# Altium PCB esp_altimeter_1.PcbDoc
Units mm, origin at the board's own origin, x right, y up, seen from the top; angles counter-clockwise.
Board outline 18.75 x 26.5 mm, 2 copper layers (Top Layer, Bottom Layer); 24 components, 15 nets, 82 pads, 21 vias.
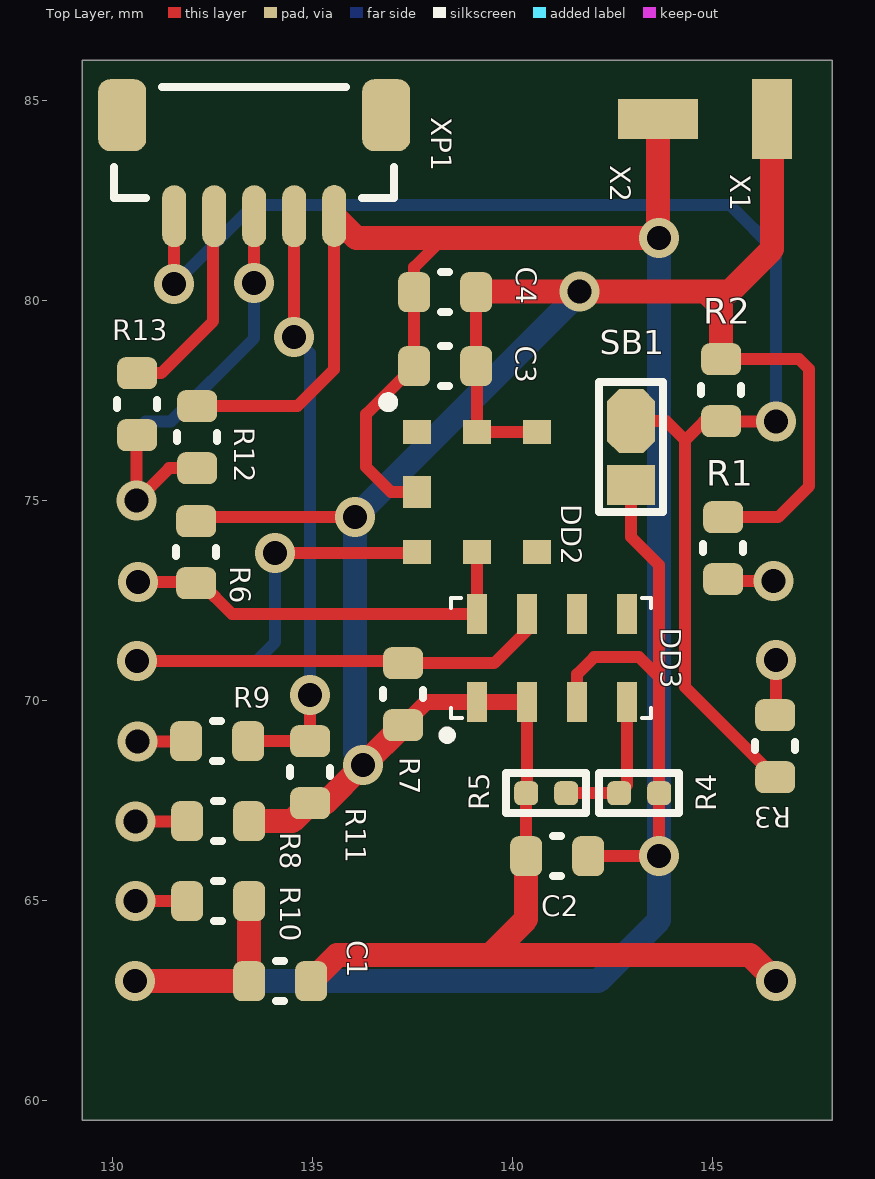
[diagram p0: Top Layer view]
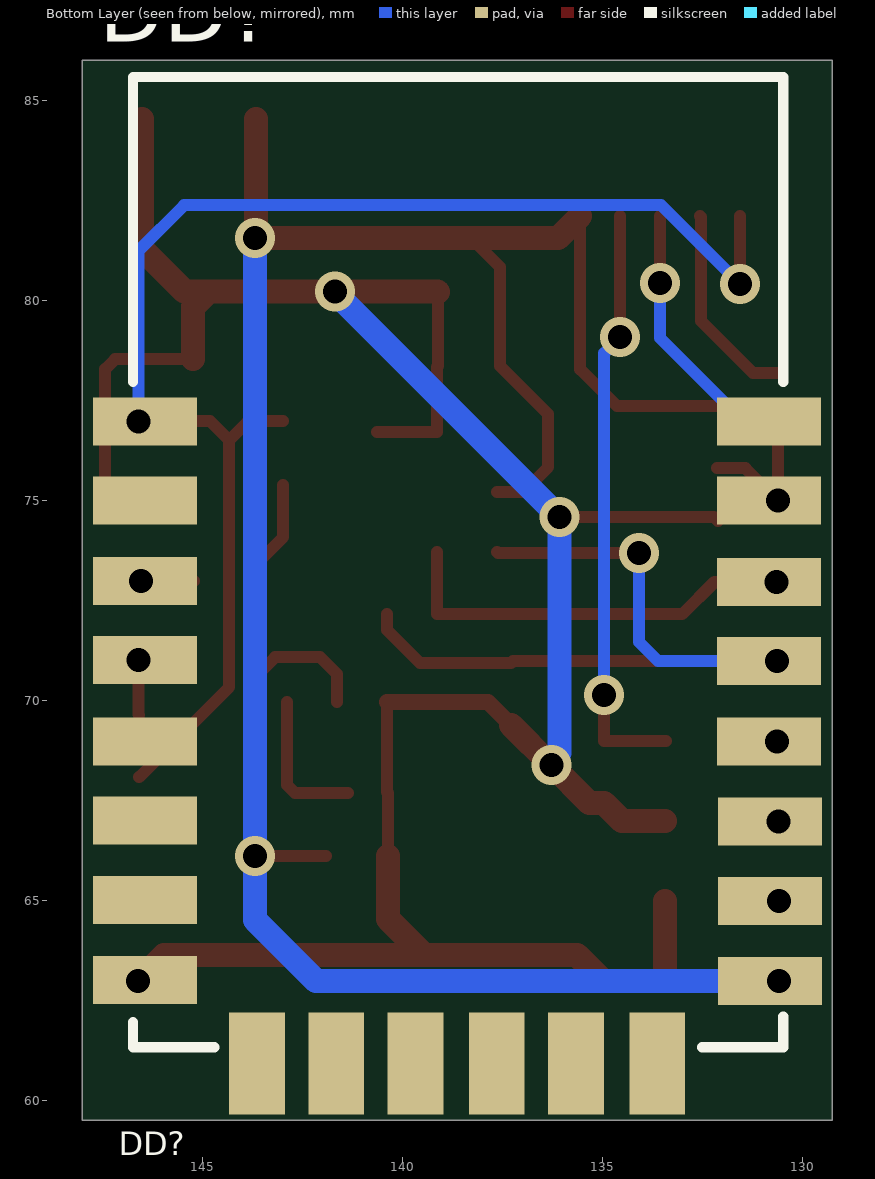
[diagram p1: Bottom Layer view, seen from below]
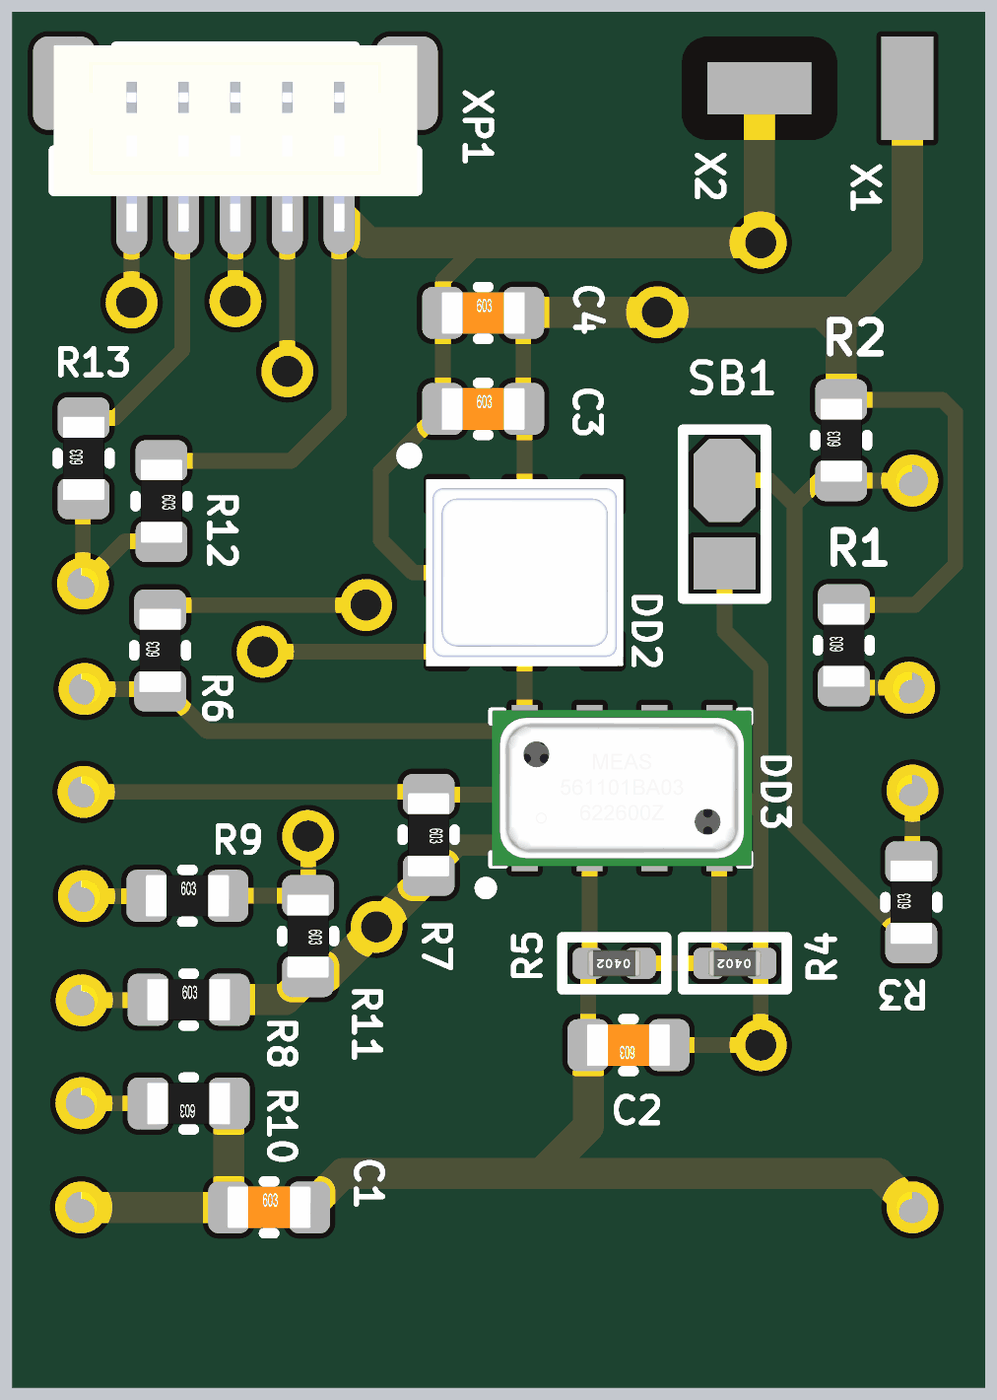
[diagram p2: 3D render of the assembled board from above, using the file's embedded part models]

## Layer stack, top to bottom
Top Solder: solder mask 0.0102, Solder Resist, Dk 3.5
Top Layer: signal copper 0.0356
Dielectric 1: dielectric 0.32, FR-4, Dk 4.8
Bottom Layer: signal copper 0.0356
Bottom Solder: solder mask 0.0102, Solder Resist, Dk 3.5

## Board outline
129.25,59.5 129.25,86 148,86 148,59.5

## Design rules (kind name [scope] priority, off if disabled: settings)
Clearance [All] p1: gap=0 ignorepadtopadclearanceinfootprint=FALSE
PolygonConnect [All] p1: connectstyle=Relief reliefconductorwidth=0.254 reliefentries=4 polygonreliefangle="90 Angle" airgapwidth=0.254
RoutingVias [All] p1: holewidth=0.6 width=1 viastyle="Through Hole" minholewidth=0.6 minwidth=1 maxholewidth=0.6 maxwidth=1
SolderMaskExpansion [All] p1: expansion=0.102
Width [All] p1: maxlimit=2 minlimit=0.3 preferedwidth=0.3
30 further rules are at their usual default settings.

## Components (designator, comment, footprint, x,y, rotation, side; value= is the part's Value field where it differs from the comment)
C1 "Cap EIA 0603" "CAP EIA 0603" 134.2,62.975 r0 top value=0.1uF
C2 "Cap EIA 0603" "CAP EIA 0603" 141.125,66.1 r180 top value=100nF
C3 "Cap EIA 0603" "CAP EIA 0603" 138.325,78.35 r0 top
C4 "Cap EIA 0603" "CAP EIA 0603" 138.325,80.2 r0 top
DD2 "BMP180" BMP180 139.125,75.2 r180 top
DD3 "MS5611" MS5611 140.975,71.05 r90 top
DD? "ESP8266-12E" "ESP8266 ESP-12-E" 129.839,60.562 r180 bottom
R1 "Res EIA 0603" "RES EIA 0603" 145.275,73.8 r90 top value=10k
R2 "Res EIA 0603" "RES EIA 0603" 145.225,77.75 r90 top value=10k
R3 "Res EIA 0603" "RES EIA 0603" 146.575,68.85 r90 top value=470
R4 "Res EIA 0402" "RES EIA 0402" 143.175,67.675 r180 top value=0
R5 "Res EIA 0402" "RES EIA 0402" 140.85,67.675 r180 top value=0
R6 "Res EIA 0603" "RES EIA 0603" 132.1,73.7 r90 top value=10k
R7 "Res EIA 0603" "RES EIA 0603" 137.275,70.15 r270 top value=10k
R8 "Res EIA 0603" "RES EIA 0603" 132.65,66.975 r0 top value=10k
R9 "BURN" "RES EIA 0603" 132.625,68.975 r0 top
R10 "Res EIA 0603" "RES EIA 0603" 132.65,64.975 r180 top value=10k
R11 "Res EIA 0603" "RES EIA 0603" 134.95,68.2 r270 top value=10k
R12 "Res EIA 0603" "RES EIA 0603" 132.125,76.575 r270 top value=22k
R13 "Res EIA 0603" "RES EIA 0603" 130.625,77.4 r90 top value=10k
SB1 "RESET" SB_Connector 142.975,76.275 r90 top value="Соединительная площадка"
X1 "V_Bat+" "Pin - Referal"#1 146.5,84.525 r0 top value="Generic Pin Contact Referal"
X2 "V_Bat_GND" "Pin - Referal"#2 143.65,84.525 r0 top value="Generic Pin Contact Referal"
XP1 "BM05B-SRSS-TB" BM05B-SRSS-TB 133.55,83.825 r0 top value="Разъем штыревой 5-и контактный угловой"

## Footprints (in the part's own frame and the unit in brackets; to place one, negate y for a bottom-side part, rotate by r counter-clockwise, add the part's x,y. Pads: shape width x height; smd on the part's side, far side on the other; paste and mask are expansions set on the pad)
BM05B-SRSS-TB [mm]
  rrect50% 1.2x1.8 smd: 0(-3.3,0.8) 0(3.3,0.8)
  oval 0.6x1.55 smd: 1(-2,-1.725) 2(-1,-1.725) 3(0,-1.725) 4(1,-1.725) 5(2,-1.72)
  silkscreen extent -3.5,-1.28 3.5,1.5, body extent -3.5,-2.07 3.5,1.53, height 4.25
BMP180 [mm] "A specific case for Bosch pressure sensor"
  rect 0.7x0.6 smd: 1(1.5,-1.5) 2(0,-1.5) 3(-1.5,-1.5) 4(-1.5,1.5) 5(0,1.5) 6(1.5,1.5)
  rect 0.7x0.8 smd: 7(1.5,0)
  silkscreen extent 2.1,-2.37 2.35,-2.13, body extent -1.9,-1.8 1.9,1.8, height 1.01
"CAP EIA 0603" [mm] "Chip Resistor, 2-Leads, Body 1.57x0.85mm, IPC Medium Density"
  rrect50% 0.8x1 smd: 1(-0.775,0) 2(0.775,0)
  silkscreen extent -0.1,-0.5 0.1,0.5, body extent -0.8,-0.4 0.8,0.4, height 0.3
"ESP8266 ESP-12-E" [mil] "ESP8266 ESP-12-E"
  rect 102.36x47.24 smd: 1(-653,646) 2(-653,568) 3(-653,489) 4(-653,411) 5(-653,331) 6(-653,253) 7(-653,175) 8(-653,96) 15(-38,95) 16(-38,174) 17(-38,252) 18(-39,331) 19(-39,410) 20(-39,488) 21(-39,568) 22(-39,646)
  rect 55x100 smd: 9(-543,14) 10(-465,14) 11(-387,14) 12(-307,14) 13(-229,14) 14(-149,14)
  silkscreen extent -665,30 -25,985, body extent -660,32 -29,977, height 104
MS5611 [mm]
  rect 1x0.5 smd: 1(-1.1,1.85) 2(-1.1,0.6) 3(-1.1,-0.65) 4(-1.1,-1.9) 5(1.1,-1.9) 6(1.1,-0.65) 7(1.1,0.6) 8(1.1,1.85)
  silkscreen extent -2.02,-2.5 1.5,2.69, body extent -1.5,-2.52 1.5,2.48, height 1.02
"Pin - Referal"#1 [mm]
  rect 1x2 smd: 1(0,0)
"Pin - Referal"#2 [mm]
  rect 2x1 smd mask+0.5: 1(0,0)
"RES EIA 0402" [mm] "Chip Resistor, 2-Leads, Body 1,00x0,50mm, IPC Medium Density"
  rrect50% 0.6x0.6 smd: 1(-0.5,0) 2(0.5,0)
  silkscreen extent -1,-0.5 1,0.5, body extent -0.51,-0.25 0.51,0.25, height 0.51
"RES EIA 0603" [mm] "Chip Resistor, 2-Leads, Body 1.57x0.85mm, IPC Medium Density"
  rrect50% 0.8x1 smd: 1(-0.775,0) 2(0.775,0)
  silkscreen extent -0.1,-0.5 0.1,0.5, body extent -0.8,-0.4 0.8,0.4, height 0.3
SB_Connector [mm]
  rect 1x1.2 smd: 1(-0.9,0)
  oct 1.6x1.2 smd: 2(0.7,0)
  silkscreen extent -1.58,-0.8 1.68,0.8

## Part data
DD2: Manufacturer=Bosch, Group=Микросхемы, Name=BMP180, Supplier=www.elsin.ru
DD?: library part "ESP8266 ESP-12E-RU"
R9: library part "Res EIA 0603", Group=Резисторы
SB1: library part SB_STM_Type, Manufacturer=A_Gorbunov, Group=Разъемы
X1 X2: library part Pin_Referal, "Generic Pin Contact", Manufacturer=-, Group=-, Name=-, Supplier=-
XP1: "5-Pin Angle Connector", Manufacturer=JST, Group=Разъемы, Name=BM05B-SRSS-TB, Supplier="ООО\"Компэл\""
C1 C2 C3 C4: Group=Конденсаторы
R1 R2 R3 R4 R5 R6 R7 R8 R10 R11 R12 R13: Group=Резисторы

## Via types
v1: diameter 1, hole 0.6, Top Layer to Bottom Layer, 21 vias

## Nets (pads, with @x,y where several pads share a name; then routed paths per layer and width w, separated by ;. In a path a pad name is that pad's centre, name@x,y a point inside that pad or via, vN(x,y) a via of type N, cw(c..) or ccw(c..) an arc to the next point about the centre after c; other vN are vias at no path point)
+3.3V: C1.2 C2.2 C3.2 C4.2 DD2.2 DD2.3 DD3.1 DD3.2 DD?.8 R1.2 R2.2 R5.2 R6.2 R7.2 R8.2 R11.2 X1.1 | length 71
  Top Layer w0.3: R6.2 132.199,74.574 v1(136.068,74.574) ; C4.2 C3.2 139.125,78.325 DD2.2 DD2.3 ; C2.2 R5.2 140.375,67.7 DD3.2 ; R2.2 147.175,78.525 147.425,78.275 147.425,75.35 146.65,74.575 R1.2
  Top Layer w0.4: R7.2 137.85,69.95 DD3.1 DD3.2
  Top Layer w0.6: R8.2 134.5,66.975 R11.2 135.319,67.425 v1(136.271,68.377) 136.277,68.377 R7.2 ; C1.2 135.625,63.625 139.45,63.625 ; C4.2 139.113,80.213 v1(141.681,80.213) 144.85,80.213 ; C2.2 140.35,64.525 139.45,63.625 ; R2.2 145.225,79.838 144.85,80.213 ; X1.1 146.5,81.275 145.438,80.213 144.85,80.213 ; v1(146.6,62.975) 145.95,63.625 139.45,63.625
  Bottom Layer w0.3: v1@136.068,68.682 136.017,68.631 v1(136.271,68.377) ; v1@141.681,80.188 v1(141.681,80.213)
  Bottom Layer w0.6: v1@136.068,68.682 v1(136.068,74.574) v1@141.681,80.188
Ardu_RX: R13.2 XP1.2 | length 5.1
  Top Layer w0.3: R13.2 131.225,78.175 132.525,79.475 132.525,82.075 XP1.2
Ardu_TX: DD?.22 XP1.3 | length 6.6
  Top Layer w0.3: v1(133.55,80.425) XP1.3
  Bottom Layer w0.3: DD?.22 131.47,76.97 133.55,79.05 v1(133.55,80.425)
DTR: R9.2 R11.1 XP1.4 | length 15
  Top Layer w0.3: R9.2 R11.1 v1(134.95,70.125) ; v1(134.55,79.075) XP1.4
  Bottom Layer w0.3: v1@134.647,79.172 v1(134.55,79.075) 134.95,78.675 v1(134.95,70.125)
GND: C1.1 C2.1 C3.1 C4.1 DD2.7 DD3.3 DD?.15 R4.1 R10.1 R12.1 SB1.1 X2.1 XP1.5 | length 77.2
  Top Layer w0.3: R12.1 134.627,77.35 135.55,78.273 XP1.5 ; DD2.7 136.975,75.2 136.35,75.825 136.35,77.15 C3.1 C4.1 137.55,80.825 138.275,81.55 ; DD3.3 141.625,70.65 142.05,71.075 143.175,71.075 143.675,70.575 ; C2.1 v1(143.675,66.1) R4.1 143.675,70.575 ; SB1.1 142.975,74.075 143.675,73.375 143.675,70.575 ; X2.1 X2.1@143.675,84.5
  Top Layer w0.6: v1(130.575,62.975) C1.1@133.425,62.975 ; C1.1 R10.1 ; XP1.5 136.105,81.55 138.275,81.55 v1(143.675,81.55) 143.65,81.575 X2.1
  Bottom Layer w0.3: v1(130.575,62.975) DD?.15
  Bottom Layer w0.6: DD?.15 142.15,62.975 143.675,64.5 v1(143.675,66.1) v1(143.675,81.55)
NetDD3_4: DD3.4 R4.2 R5.1 | length 3.7
  Top Layer w0.3: R5.1 R4.2 142.875,67.875 DD3.4
NetDD?_3: DD?.3 R1.1 | length 1.4
  Top Layer w0.3: R1.1@145.2,72.975 145.207,72.982 v1(146.532,72.982)
  Bottom Layer w0.3: DD?.3 v1(146.532,72.982)
NetDD?_4: DD?.4 R3.2 | length 1.6
  Top Layer w0.3: R3.2 146.599,69.649 v1(146.599,71.001)
  Bottom Layer w0.3: DD?.4 v1(146.599,71.001)
NetDD?_16: DD?.16 R10.2 | length 1.5
  Top Layer w0.3: v1(130.581,64.981) 130.587,64.975 R10.2
  Bottom Layer w0.3: v1(130.581,64.981) DD?.16
NetDD?_17: DD?.17 R8.1 | length 1.5
  Top Layer w0.3: v1(130.587,66.962) 131.862,66.962 R8.1
  Bottom Layer w0.3: v1(130.587,66.962) DD?.17
NetDD?_18: DD?.18 R9.1 | length 1.4
  Top Layer w0.3: v1@130.637,68.975 v1(130.631,68.969) 131.844,68.969 R9.1
  Bottom Layer w0.3: v1(130.631,68.969) DD?.18
NetDD?_21: DD?.21 R12.2 R13.1 | length 3.7
  Top Layer w0.3: R13.1 130.611,76.611 v1(130.611,74.989) 131.422,75.8 R12.2
  Bottom Layer w0.3: v1(130.611,74.989) DD?.21
RTS: DD?.1 R2.1 R3.1 SB1.2 XP1.1 | length 35.8
  Top Layer w0.3: v1(131.55,80.4) XP1.1 ; SB1.2 143.85,76.975 144.325,76.5 ; R3.1 144.325,70.325 144.325,76.5 ; v1(146.595,76.97) 145.23,76.97 R2.1 144.8,76.975 144.325,76.5
  Bottom Layer w0.3: v1(131.55,80.4) 133.525,82.375 145.45,82.375 146.595,81.23 v1(146.595,76.97) DD?.1
SCL: DD2.5 DD3.8 DD?.20 R6.1 | length 10.6
  Top Layer w0.3: v1(130.643,72.957) 132.193,72.957 133,72.15 DD3.8 DD2.5
  Bottom Layer w0.3: v1(130.643,72.957) DD?.20
SDA: DD2.6 DD3.7 DD?.19 R7.1 | length 19.9
  Top Layer w0.3: v1(130.624,70.976) 137.224,70.976 R7.1 139.55,70.925 140.375,71.75 DD3.7 ; v1(134.075,73.675) 137.6,73.675 DD2.6
  Bottom Layer w0.3: v1(130.624,70.976) DD?.19 133.599,70.976 134.075,71.451 v1(134.075,73.675)
pads on no net: DD2.1 DD2.4 DD3.5 DD3.6 DD?.2 DD?.5 DD?.6 DD?.7 DD?.9 DD?.10 DD?.11 DD?.12 DD?.13 DD?.14 XP1.0

## Silkscreen, mask and mechanical layers (free items; w line width, h text height)
Mechanical 1:
  the board outline again, w0.3

## Text inside footprints (layer, text, board x,y; h text height)
DD?: Mechanical 13 "ANTENNA AREA" at 146.424,84.961 h0.25; Mechanical 13 "CUTOUT POLYGON" at 146.424,84.453 h0.25